# Altium PCB FPW1-0-2.PcbDoc (part 10 of 11)
Units mm, origin at the board's own origin, x right, y up, seen from the top; angles counter-clockwise.
Board outline 85 x 56 mm, 4 copper layers (Top Layer, GND_Plane, 3V3_Plane, Bottom Layer); 182 components, 321 nets, 1106 pads, 360 vias.
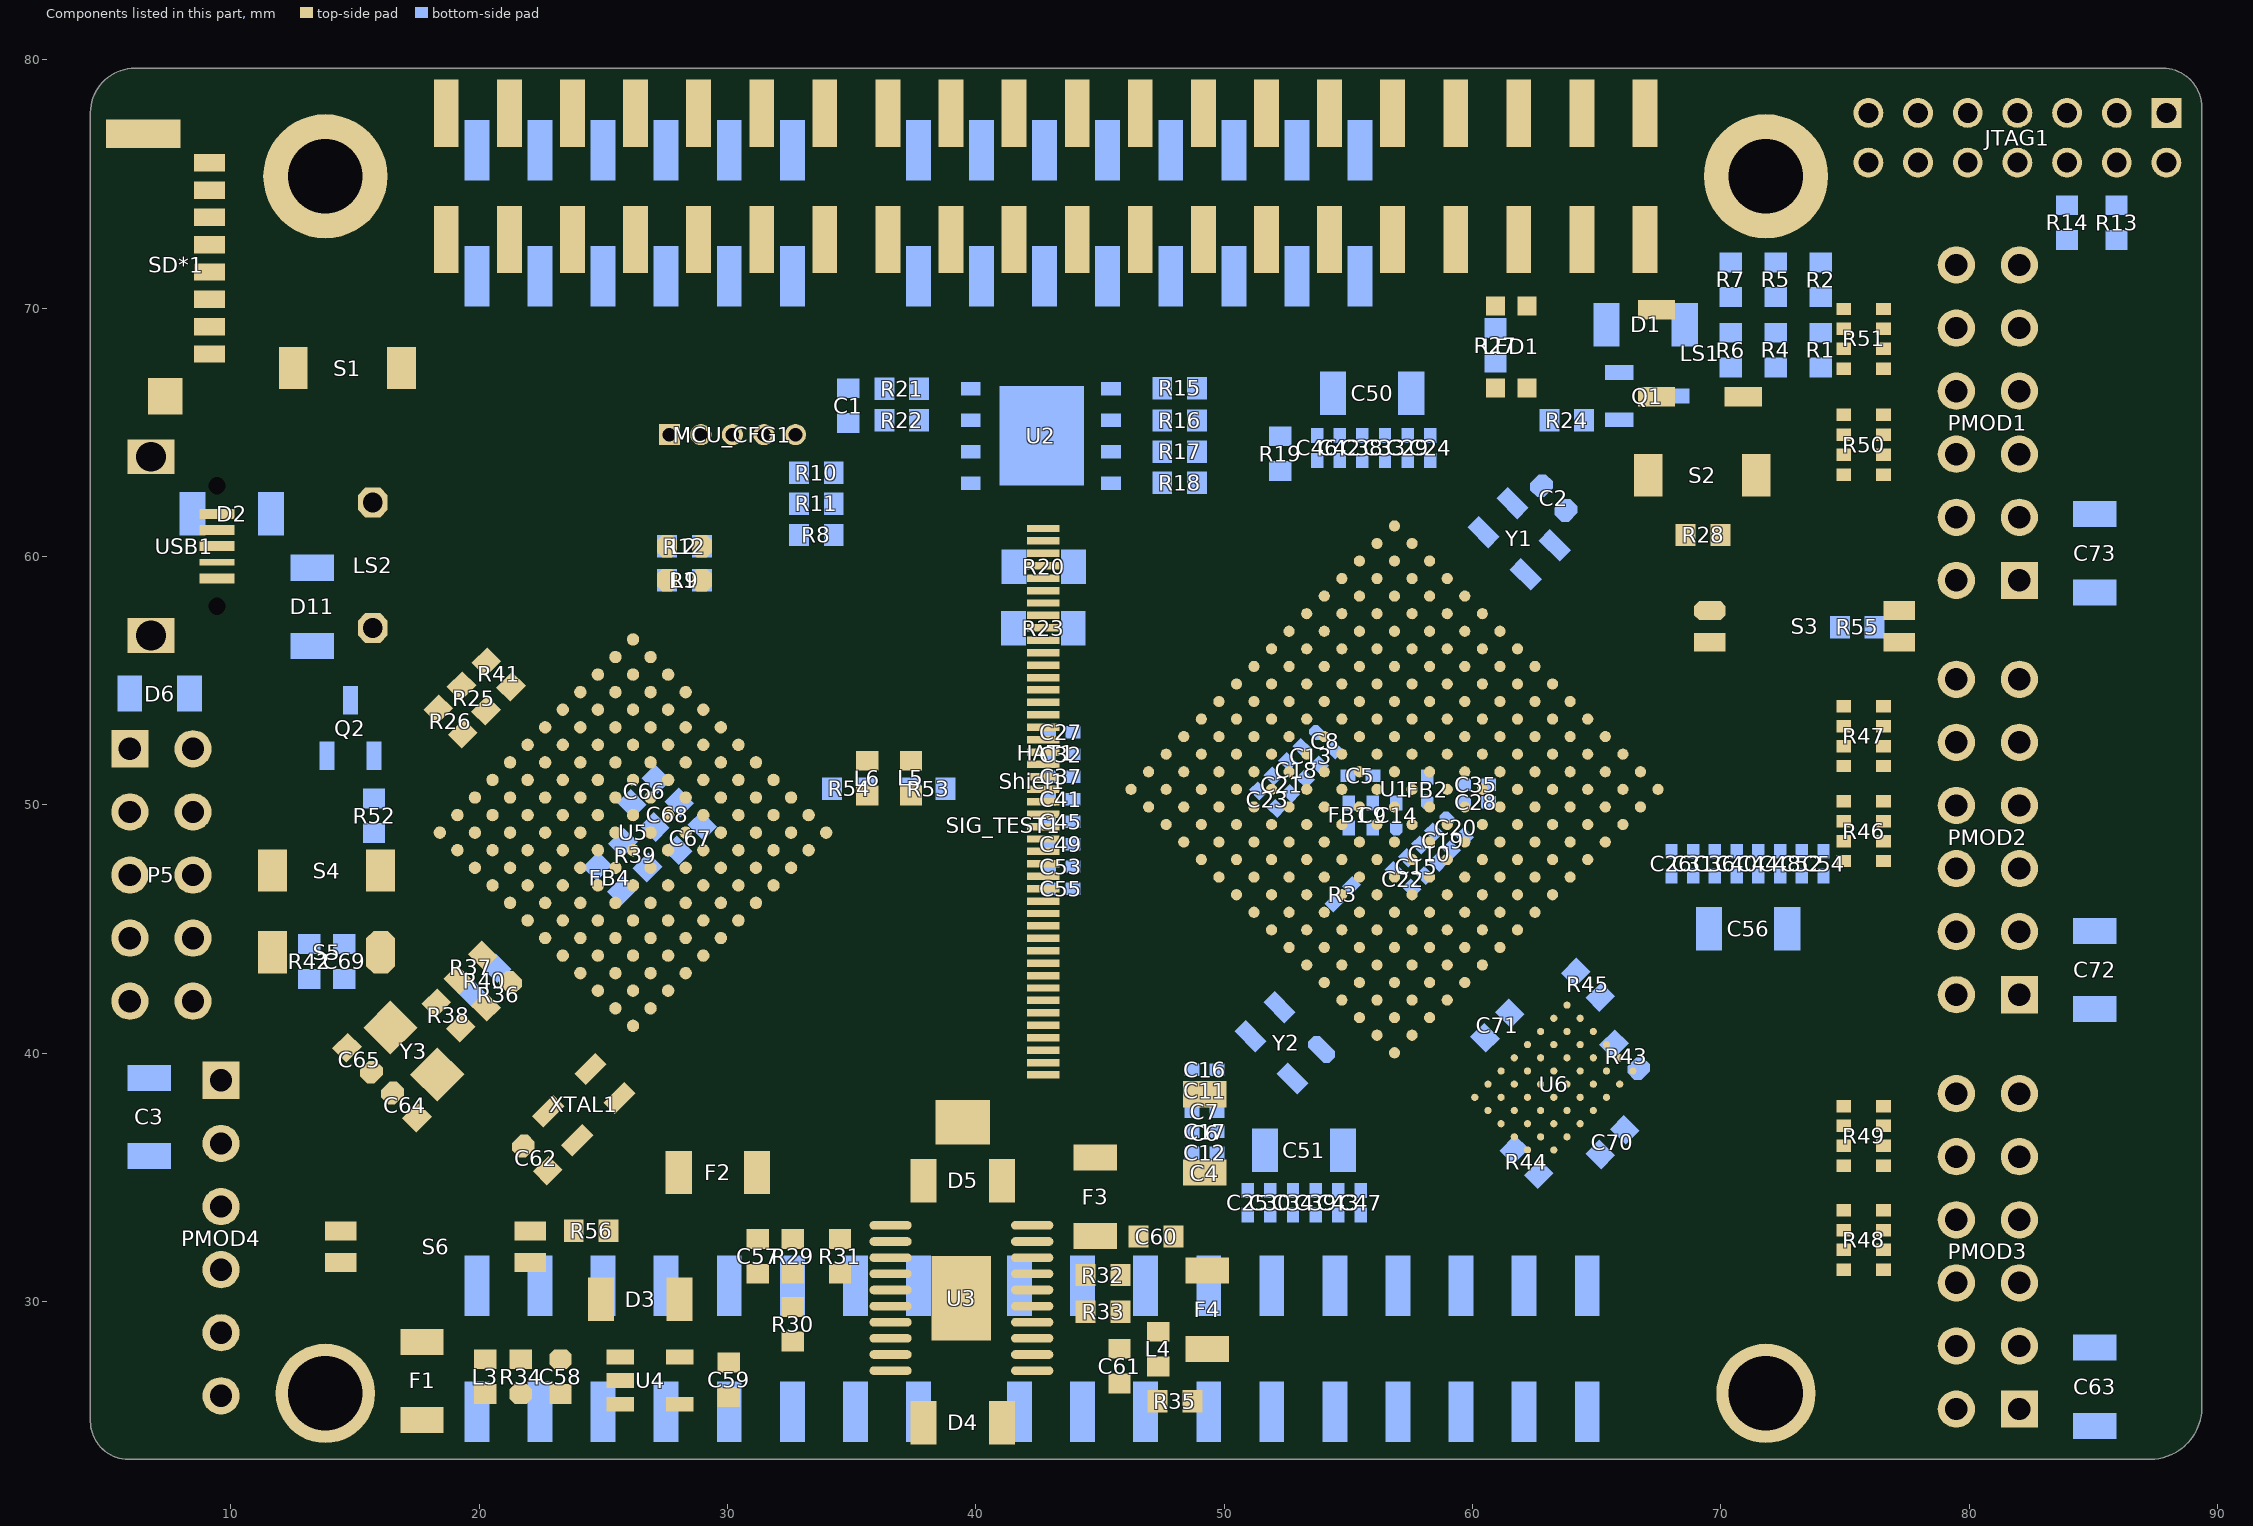
[diagram p12: the components of this part, seen from the top]

## Via types
v1: diameter 0.45, hole 0.2, Top Layer to Bottom Layer, tented both sides, 280 vias
v2: diameter 0.61, hole 0.33, Top Layer to Bottom Layer, tented both sides, 40 vias
v3: diameter 0.403, hole 0.2, Top Layer to Bottom Layer, tented both sides, 15 vias
v4: diameter 0.5, hole 0.2, Top Layer to Bottom Layer, tented both sides, 12 vias
v5: diameter 0.864, hole 0.508, Top Layer to Bottom Layer, tented both sides, 11 vias
v6: diameter 0.864, hole 0.356, Top Layer to Bottom Layer, tented both sides, 1 vias
v7: diameter 0.864, hole 0.381, Top Layer to Bottom Layer, tented both sides, 1 vias

## Nets (pads, with @x,y where several pads share a name; then routed paths per layer and width w, separated by ;. In a path a pad name is that pad's centre, name@x,y a point inside that pad or via, vN(x,y) a via of type N, cw(c..) or ccw(c..) an arc to the next point about the centre after c; other vN are vias at no path point) (continued)
copper on no net: (continued)
  Top Layer w0.025: 86.081,52.159 86.081,52.167 ; 86.081,67.78 86.081,67.814 ; 86.106,49.847 86.106,50.008 ; 86.106,52.184 86.106,52.218 ; 86.106,52.311 86.106,52.472 ; 86.106,67.729 86.106,67.89 ; 86.131,49.847 86.131,50.059 ; 86.131,52.184 86.131,52.523 ; 86.131,67.729 86.131,67.915 ; 86.157,49.924 86.157,50.085 ; 86.157,52.235 86.157,52.548 ; 86.157,67.831 86.157,67.941 ; 86.182,48.806 86.182,48.815 ; 86.182,49.949 86.182,50.11 ; 86.182,52.261 86.182,52.574 ; 86.182,64.198 86.182,64.207 ; 86.182,67.856 86.182,67.992 ; 86.208,48.831 86.208,48.84 ; 86.208,49.974 86.208,50.135 ; 86.208,52.286 86.208,52.548 ; 86.208,58.839 86.208,59 ; 86.208,64.224 86.208,64.258 ; 86.208,67.856 86.208,68.042 ; 86.233,48.831 86.233,48.865 ; 86.233,49.974 86.233,50.161 ; 86.233,52.311 86.233,52.523 ; 86.233,58.788 86.233,59.025 ; 86.233,64.224 86.233,64.283 ; 86.233,67.856 86.233,68.042 ; 86.258,46.571 86.258,46.579 ; 86.258,48.857 86.258,48.865 ; 86.258,49.974 86.258,50.186 ; 86.258,52.311 86.258,52.447 ; 86.258,58.737 86.258,59.076 ; 86.258,64.249 86.258,64.334 ; 86.258,67.323 86.258,67.458 ; 86.258,67.856 86.258,68.068 ; 86.284,46.419 86.284,46.681 ; 86.284,48.857 86.284,48.916 ; 86.284,49.974 86.284,50.186 ; 86.284,52.311 86.284,52.371 ; 86.284,58.737 86.284,59.102 ; 86.284,64.249 86.284,64.359 ; 86.284,67.373 86.284,67.534 ; 86.284,67.856 86.284,68.195 ; 86.309,46.342 86.309,46.706 ; 86.309,48.857 86.309,48.967 ; 86.309,49.314 86.309,49.424 ; 86.309,49.974 86.309,50.186 ; 86.309,52.286 86.309,52.345 ; 86.309,52.438 86.309,52.548 ; 86.309,58.306 86.309,58.416 ; 86.309,58.712 86.309,58.746 ; 86.309,58.941 86.309,59.127 ; 86.309,64.249 86.309,64.41 ; 86.309,67.399 86.309,67.534 ; 86.309,67.856 86.309,68.246 ; 86.335,46.215 86.335,46.732 ; 86.335,48.882 86.335,48.992 ; 86.335,49.365 86.335,49.526 ; 86.335,49.949 86.335,50.186 ; 86.335,52.261 86.335,52.625 ; 86.335,58.255 86.335,58.467 ; 86.335,58.687 86.335,58.721 ; 86.335,58.966 86.335,59.152 ; 86.335,64.224 86.335,64.41 ; 86.335,67.399 86.335,67.534 ; 86.335,67.754 86.335,68.246 ; 86.36,46.139 86.36,46.757 ; 86.36,48.882 86.36,49.018 ; 86.36,49.39 86.36,49.551 ; 86.36,49.949 86.36,50.161 ; 86.36,52.235 86.36,52.65 ; 86.36,58.331 86.36,58.492 ; 86.36,58.661 86.36,58.695 ; 86.36,58.991 86.36,59.178 ; 86.36,64.224 86.36,64.436 ; 86.36,64.63 86.36,64.664 ; 86.36,67.424 86.36,67.56 ; 86.36,67.653 86.36,68.246 ; 86.385,46.012 86.385,46.783 ; 86.385,48.882 86.385,49.043 ; 86.385,49.416 86.385,49.577 ; 86.385,49.949 86.385,50.135 ; 86.385,52.184 86.385,52.625 ; 86.385,58.382 86.385,58.543 ; 86.385,58.661 86.385,58.67 ; 86.385,58.991 86.385,59.178 ; 86.385,64.198 86.385,64.436 ; 86.385,64.656 86.385,64.74 ; 86.385,67.45 86.385,68.246 ; 86.411,45.885 86.411,46.808 ; 86.411,48.857 86.411,49.069 ; 86.411,49.416 86.411,49.577 ; 86.411,49.924 86.411,50.135 ; 86.411,52.032 86.411,52.625 ; 86.411,58.433 86.411,58.594 ; 86.411,58.636 86.411,58.67 ; 86.411,58.991 86.411,59.203 ; 86.411,64.173 86.411,64.436 ; 86.411,64.656 86.411,64.842 ; 86.411,67.424 86.411,68.22 ; 86.436,45.783 86.436,45.792 ; 86.436,45.86 86.436,46.402 ; 86.436,46.495 86.436,46.808 ; 86.436,48.857 86.436,49.069 ; 86.436,49.441 86.436,49.577 ; 86.436,49.924 86.436,50.11 ; 86.436,52.057 86.436,52.599 ; 86.436,58.458 86.436,58.644 ; 86.436,59.017 86.436,59.229 ; 86.436,64.148 86.436,64.436 ; 86.436,64.656 86.436,64.842 ; 86.436,67.348 86.436,68.169 ; 86.462,43.243 86.462,43.252 ; 86.462,45.961 86.462,46.3 ; 86.462,46.495 86.462,46.783 ; 86.462,48.857 86.462,49.069 ; 86.462,49.441 86.462,49.577 ; 86.462,49.924 86.462,50.11 ; 86.462,52.083 86.462,52.574 ; 86.462,58.509 86.462,58.67 ; 86.462,59.017 86.462,59.229 ; 86.462,61.531 86.462,61.54 ; 86.462,64.148 86.462,64.41 ; 86.462,64.656 86.462,64.867 ; 86.462,67.246 86.462,67.966 ; 86.487,43.243 86.487,43.303 ; 86.487,46.038 86.487,46.173 ; 86.487,46.495 86.487,46.757 ; 86.487,48.831 86.487,49.043 ; 86.487,49.441 86.487,49.577 ; 86.487,49.924 86.487,50.11 ; 86.487,50.152 86.487,50.237 ; 86.487,52.133 86.487,52.625 ; 86.487,58.509 86.487,58.721 ; 86.487,59.017 86.487,59.229 ; 86.487,61.531 86.487,61.591 ; 86.487,64.122 86.487,64.385 ; 86.487,64.656 86.487,64.867 ; 86.487,67.246 86.487,67.661 ; 86.487,67.78 86.487,67.941 ; 86.512,43.269 86.512,43.328 ; 86.512,46.088 86.512,46.097 ; 86.512,46.495 86.512,46.757 ; 86.512,48.831 86.512,48.992 ; 86.512,49.441 86.512,49.602 ; 86.512,49.898 86.512,50.288 ; 86.512,52.184 86.512,52.675 ; 86.512,58.534 86.512,58.746 ; 86.512,59.017 86.512,59.229 ; 86.512,61.557 86.512,61.616 ; 86.512,64.097 86.512,64.359 ; 86.512,64.63 86.512,64.867 ; 86.512,67.323 86.512,67.585 ; 86.512,67.78 86.512,67.915 ; 86.538,43.269 86.538,43.379 ; 86.538,46.495 86.538,46.732 ; 86.538,48.806 86.538,48.967 ; 86.538,49.466 86.538,49.602 ; 86.538,49.873 86.538,50.313 ; 86.538,52.21 86.538,52.32 ; 86.538,52.514 86.538,52.701 ; 86.538,58.534 86.538,58.746 ; 86.538,59.017 86.538,59.229 ; 86.538,61.557 86.538,61.667 ; 86.538,64.046 86.538,64.359 ; 86.538,64.63 86.538,64.842 ; 86.538,67.373 86.538,67.585 ; 86.538,67.78 86.538,67.915 ; 86.538,68.034 86.538,68.22 ; 86.563,43.294 86.563,43.404 ; 86.563,46.469 86.563,46.706 ; 86.563,48.781 86.563,48.916 ; 86.563,49.466 86.563,49.602 ; 86.563,49.771 86.563,50.313 ; 86.563,52.565 86.563,52.726 ; 86.563,58.56 86.563,58.771 ; 86.563,59.017 86.563,59.229 ; 86.563,61.582 86.563,61.692 ; 86.563,64.021 86.563,64.334 ; 86.563,64.605 86.563,64.817 ; 86.563,67.45 86.563,67.585 ; 86.563,67.754 86.563,68.246 ; 86.589,43.294 86.589,43.43 ; 86.589,46.469 86.589,46.681 ; 86.589,48.755 86.589,48.865 ; 86.589,49.466 86.589,49.602 ; 86.589,49.67 86.589,50.313 ; 86.589,52.565 86.589,52.777 ; 86.589,58.56 86.589,58.771 ; 86.589,59.017 86.589,59.229 ; 86.589,61.582 86.589,61.718 ; 86.589,63.995 86.589,64.283 ; 86.589,64.579 86.589,64.817 ; 86.589,67.475 86.589,67.585 ; 86.589,67.754 86.589,68.246 ; 86.614,43.269 86.614,43.481 ; 86.614,46.444 86.614,46.656 ; 86.614,48.73 86.614,48.815 ; 86.614,49.466 86.614,50.313 ; 86.614,51.981 86.614,52.04 ; 86.614,52.565 86.614,52.777 ; 86.614,58.56 86.614,58.771 ; 86.614,59.017 86.614,59.229 ; 86.614,61.557 86.614,61.769 ; 86.614,63.97 86.614,64.258 ; 86.614,64.554 86.614,64.791 ; 86.614,65.596 86.614,65.782 ; 86.614,67.475 86.614,67.585 ; 86.614,67.729 86.614,68.271 ; 86.614,70.193 86.614,70.201 ; 86.639,43.269 86.639,43.506 ; 86.639,46.444 86.639,46.63 ; 86.639,48.704 86.639,48.789 ; 86.639,49.466 86.639,50.059 ; 86.639,50.203 86.639,50.288 ; 86.639,52.006 86.639,52.167 ; 86.639,52.565 86.639,52.777 ; 86.639,58.56 86.639,58.771 ; 86.639,59.017 86.639,59.229 ; 86.639,61.557 86.639,61.794 ; 86.639,63.944 86.639,64.232 ; 86.639,64.554 86.639,64.766 ; 86.639,65.494 86.639,65.833 ; 86.639,67.501 86.639,67.585 ; 86.639,67.678 86.639,68.271 ; 86.639,70.117 86.639,70.201 ; 86.665,43.294 86.665,43.506 ; 86.665,46.419 86.665,46.605 ; 86.665,48.679 86.665,48.738 ; 86.665,49.187 86.665,49.272 ; 86.665,49.34 86.665,50.008 ; 86.665,52.032 86.665,52.193 ; 86.665,52.54 86.665,52.777 ; 86.665,58.56 86.665,58.771 ; 86.665,59.017 86.665,59.229 ; 86.665,61.582 86.665,61.794 ; 86.665,63.919 86.665,64.182 ; 86.665,64.529 86.665,64.74 ; 86.665,65.443 86.665,65.858 ; 86.665,67.501 86.665,68.271 ; 86.665,70.04 86.665,70.201 ; 86.69,43.294 86.69,43.531 ; 86.69,46.368 86.69,46.656 ; 86.69,48.654 86.69,48.688 ; 86.69,49.212 86.69,49.983 ; 86.69,52.083 86.69,52.218 ; 86.69,52.514 86.69,52.726 ; 86.69,58.56 86.69,58.771 ; 86.69,59.017 86.69,59.229 ; 86.69,61.582 86.69,61.819 ; 86.69,63.894 86.69,64.156 ; 86.69,64.503 86.69,64.74 ; 86.69,65.367 86.69,65.883 ; 86.69,67.501 86.69,67.966 ; 86.69,68.034 86.69,68.246 ; 86.69,69.99 86.69,70.201 ; 86.716,43.269 86.716,43.506 ; 86.716,46.291 86.716,46.656 ; 86.716,48.603 86.716,48.637 ; 86.716,49.289 86.716,49.704 ; 86.716,49.847 86.716,49.983 ; 86.716,52.108 86.716,52.244 ; 86.716,52.489 86.716,52.701 ; 86.716,58.56 86.716,58.771 ; 86.716,59.017 86.716,59.229 ; 86.716,61.557 86.716,61.794 ; 86.716,63.868 86.716,64.131 ; 86.716,64.478 86.716,64.715 ; 86.716,65.316 86.716,65.883 ; 86.716,67.475 86.716,67.89 ; 86.716,68.034 86.716,68.246 ; 86.716,69.99 86.716,70.201 ; 86.741,43.269 86.741,43.481 ; 86.741,46.164 86.741,46.656 ; 86.741,48.578 86.741,48.586 ; 86.741,49.314 86.741,49.627 ; 86.741,49.847 86.741,49.958 ; 86.741,52.108 86.741,52.269 ; 86.741,52.489 86.741,52.65 ; 86.741,58.585 86.741,58.771 ; 86.741,59.017 86.741,59.229 ; 86.741,61.557 86.741,61.769 ; 86.741,63.843 86.741,64.08 ; 86.741,64.453 86.741,64.664 ; 86.741,65.265 86.741,65.579 ; 86.741,65.697 86.741,65.909 ; 86.741,67.145 86.741,67.153 ; 86.741,67.424 86.741,67.788 ; 86.741,68.034 86.741,68.246 ; 86.741,69.99 86.741,70.201 ; 86.766,43.243 86.766,43.455 ; 86.766,46.063 86.766,46.605 ; 86.766,48.527 86.766,48.561 ; 86.766,49.34 86.766,49.602 ; 86.766,49.822 86.766,49.932 ; 86.766,52.108 86.766,52.269 ; 86.766,52.464 86.766,53.056 ; 86.766,58.585 86.766,58.771 ; 86.766,59.017 86.766,59.229 ; 86.766,61.531 86.766,61.743 ; 86.766,63.817 86.766,64.055 ; 86.766,64.427 86.766,64.639 ; 86.766,65.189 86.766,65.502 ; 86.766,65.748 86.766,65.934 ; 86.766,67.069 86.766,67.28 ; 86.766,67.373 86.766,67.738 ; 86.766,68.034 86.766,68.22 ; 86.766,69.99 86.766,70.201 ; 86.792,43.243 86.792,43.43 ; 86.792,46.038 86.792,46.529 ; 86.792,48.476 86.792,48.51 ; 86.792,49.441 86.792,49.602 ; 86.792,49.822 86.792,49.907 ; 86.792,52.133 86.792,52.269 ; 86.792,52.438 86.792,53.107 ; 86.792,58.585 86.792,58.771 ; 86.792,59.017 86.792,59.229 ; 86.792,61.531 86.792,61.718 ; 86.792,63.792 86.792,64.029 ; 86.792,64.402 86.792,64.613 ; 86.792,65.138 86.792,65.452 ; 86.792,65.748 86.792,65.934 ; 86.792,67.145 86.792,67.458 ; 86.792,67.501 86.792,67.738 ; 86.792,68.059 86.792,68.22 ; 86.792,69.99 86.792,70.176 ; 86.817,43.243 86.817,43.43 ; 86.817,46.164 86.817,46.427 ; 86.817,48.45 86.817,48.459 ; 86.817,49.466 86.817,49.602 ; 86.817,49.822 86.817,49.907 ; 86.817,52.133 86.817,53.133 ; 86.817,58.585 86.817,58.771 ; 86.817,59.017 86.817,59.229 ; 86.817,61.531 86.817,61.718 ; 86.817,63.767 86.817,64.004 ; 86.817,64.376 86.817,64.563 ; 86.817,65.087 86.817,65.426 ; 86.817,65.773 86.817,65.96 ; 86.817,67.17 86.817,67.357 ; 86.817,67.602 86.817,67.738 ; 86.817,68.034 86.817,68.22 ; 86.817,69.99 86.817,70.176 ; 86.843,43.243 86.843,43.404 ; 86.843,46.19 86.843,46.402 ; 86.843,48.425 86.843,48.434 ; 86.843,49.492 86.843,49.602 ; 86.843,49.797 86.843,49.881 ; 86.843,52.133 86.843,53.158 ; 86.843,58.585 86.843,58.771 ; 86.843,59.017 86.843,59.229 ; 86.843,61.531 86.843,61.692 ; 86.843,63.741 86.843,63.953 ; 86.843,64.376 86.843,64.537 ; 86.843,65.011 86.843,65.375 ; 86.843,65.773 86.843,65.96 ; 86.843,67.196 86.843,67.382 ; 86.843,67.602 86.843,67.738 ; 86.843,68.034 86.843,68.195 ; 86.843,69.964 86.843,70.176 ; 86.868,43.218 86.868,43.404 ; 86.868,45.529 86.868,45.589 ; 86.868,46.291 86.868,46.427 ; 86.868,48.425 86.868,48.434 ; 86.868,49.492 86.868,49.602 ; 86.868,49.797 86.868,49.881 ; 86.868,52.057 86.868,53.183 ; 86.868,58.585 86.868,58.771 ; 86.868,59.017 86.868,59.229 ; 86.868,61.506 86.868,61.692 ; 86.868,63.716 86.868,63.953 ; 86.868,64.325 86.868,64.512 ; 86.868,64.96 86.868,65.325 ; 86.868,65.773 86.868,65.96 ; 86.868,67.221 86.868,67.382 ; 86.868,67.627 86.868,67.738 ; 86.868,68.034 86.868,68.195 ; 86.868,69.964 86.868,70.176 ; 86.893,43.218 86.893,43.379 ; 86.893,45.555 86.893,45.716 ; 86.893,46.317 86.893,46.452 ; 86.893,48.4 86.893,48.434 ; 86.893,49.492 86.893,49.602 ; 86.893,49.771 86.893,49.856 ; 86.893,51.981 86.893,53.183 ; 86.893,58.585 86.893,58.771 ; 86.893,59.017 86.893,59.229 ; 86.893,59.271 86.893,59.432 ; 86.893,61.506 86.893,61.667 ; 86.893,63.665 86.893,64.029 ; 86.893,64.3 86.893,64.461 ; 86.893,64.834 86.893,65.299 ; 86.893,65.773 86.893,65.96 ; 86.893,67.221 86.893,67.382 ; 86.893,67.627 86.893,67.738 ; 86.893,68.034 86.893,68.195 ; 86.893,69.964 86.893,70.176 ; 86.919,43.193 86.919,43.379 ; 86.919,45.555 86.919,45.767 ; 86.919,46.342 86.919,46.478 ; 86.919,48.425 86.919,48.434 ; 86.919,49.517 86.919,49.602 ; 86.919,49.771 86.919,49.831 ; 86.919,50.076 86.919,50.237 ; 86.919,51.88 86.919,53.183 ; 86.919,58.585 86.919,58.771 ; 86.919,59.017 86.919,59.61 ; 86.919,61.481 86.919,61.667 ; 86.919,63.64 86.919,63.826 ; 86.919,63.919 86.919,64.105 ; 86.919,64.224 86.919,64.41 ; 86.919,64.859 86.919,65.248 ; 86.919,65.773 86.919,65.96 ; 86.919,67.246 86.919,67.407 ; 86.919,67.627 86.919,67.738 ; 86.919,68.008 86.919,68.169 ; 86.919,69.964 86.919,70.176 ; 86.944,43.193 86.944,43.379 ; 86.944,45.58 86.944,45.792 ; 86.944,46.342 86.944,46.503 ; 86.944,48.425 86.944,48.459 ; 86.944,49.543 86.944,49.602 ; 86.944,49.746 86.944,49.831 ; 86.944,49.949 86.944,50.288 ; 86.944,51.752 86.944,52.447 ; 86.944,53.048 86.944,53.158 ; 86.944,58.585 86.944,58.771 ; 86.944,59.017 86.944,59.66 ; 86.944,61.481 86.944,61.667 ; 86.944,63.614 86.944,63.775 ; 86.944,63.944 86.944,64.105 ; 86.944,64.198 86.944,64.359 ; 86.944,64.884 86.944,65.223 ; 86.944,65.773 86.944,65.96 ; 86.944,67.246 86.944,67.407 ; 86.944,67.627 86.944,67.763 ; 86.944,68.008 86.944,68.169 ; 86.944,69.964 86.944,70.176 ; 86.97,43.193 86.97,43.354 ; 86.97,45.58 86.97,45.792 ; 86.97,46.368 86.97,46.529 ; 86.97,48.45 86.97,48.484 ; 86.97,49.543 86.97,49.602 ; 86.97,49.721 86.97,50.313 ; 86.97,51.498 86.97,52.32 ; 86.97,53.149 86.97,53.158 ; 86.97,58.585 86.97,58.771 ; 86.97,58.915 86.97,59.686 ; 86.97,61.481 86.97,61.642 ; 86.97,63.563 86.97,63.75 ; 86.97,63.944 86.97,64.131 ; 86.97,64.198 86.97,64.436 ; 86.97,64.884 86.97,65.172 ; 86.97,65.773 86.97,65.96 ; 86.97,67.221 86.97,67.407 ; 86.97,67.653 86.97,67.814 ; 86.97,68.008 86.97,68.144 ; 86.97,69.964 86.97,70.151 ; 86.995,43.193 86.995,43.354 ; 86.995,45.58 86.995,45.792 ; 86.995,46.368 86.995,46.554 ; 86.995,48.45 86.995,48.535 ; 86.995,49.568 86.995,49.602 ; 86.995,49.695 86.995,50.339 ; 86.995,51.448 86.995,52.193 ; 86.995,57.798 86.995,57.832 ; 86.995,58.56 86.995,59.686 ; 86.995,61.481 86.995,61.642 ; 86.995,63.513 86.995,63.674 ; 86.995,63.97 86.995,64.131 ; 86.995,64.198 86.995,64.486 ; 86.995,64.884 86.995,64.893 ; 86.995,64.96 86.995,65.147 ; 86.995,65.748 86.995,65.934 ; 86.995,67.221 86.995,67.407 ; 86.995,67.653 86.995,67.839 ; 86.995,67.983 86.995,68.144 ; 86.995,69.964 86.995,70.151 ; 87.02,43.167 87.02,43.328 ; 87.02,45.606 87.02,45.792 ; 87.02,46.393 87.02,46.579 ; 87.02,46.926 87.02,46.96 ; 87.02,48.476 87.02,48.611 ; 87.02,49.568 87.02,50.339 ; 87.02,51.422 87.02,51.431 ; 87.02,51.651 87.02,52.091 ; 87.02,52.565 87.02,52.752 ; 87.02,57.823 87.02,57.933 ; 87.02,58.56 87.02,59.711 ; 87.02,61.455 87.02,61.616 ; 87.02,63.487 87.02,63.623 ; 87.02,63.97 87.02,64.156 ; 87.02,64.224 87.02,64.512 ; 87.02,64.859 87.02,64.893 ; 87.02,64.986 87.02,65.147 ; 87.02,65.748 87.02,65.934 ; 87.02,67.246 87.02,67.407 ; 87.02,67.653 87.02,67.839 ; 87.02,67.983 87.02,68.144 ; 87.02,69.964 87.02,70.151 ; 87.046,43.167 87.046,43.328 ; 87.046,45.606 87.046,45.792 ; 87.046,46.393 87.046,46.579 ; 87.046,46.774 87.046,47.113 ; 87.046,48.476 87.046,48.662 ; 87.046,49.492 87.046,50.313 ; 87.046,51.702 87.046,51.99 ; 87.046,52.464 87.046,52.777 ; 87.046,57.848 87.046,57.984 ; 87.046,58.509 87.046,59.686 ; 87.046,61.455 87.046,61.616 ; 87.046,63.436 87.046,63.572 ; 87.046,63.97 87.046,64.156 ; 87.046,64.325 87.046,64.512 ; 87.046,64.834 87.046,64.867 ; 87.046,65.011 87.046,65.147 ; 87.046,65.748 87.046,65.934 ; 87.046,67.246 87.046,67.407 ; 87.046,67.627 87.046,67.865 ; 87.046,67.958 87.046,68.119 ; 87.046,69.964 87.046,70.151 ; 87.071,43.167 87.071,43.328 ; 87.071,45.606 87.071,45.767 ; 87.071,46.419 87.071,46.605 ; 87.071,46.749 87.071,47.189 ; 87.071,48.501 87.071,48.713 ; 87.071,49.39 87.071,50.288 ; 87.071,51.727 87.071,51.913 ; 87.071,52.362 87.071,52.777 ; 87.071,57.874 87.071,58.035 ; 87.071,58.433 87.071,59.686 ; 87.071,61.455 87.071,61.616 ; 87.071,63.97 87.071,64.156 ; 87.071,64.351 87.071,64.512 ; 87.071,64.834 87.071,64.867 ; 87.071,65.011 87.071,65.147 ; 87.071,65.748 87.071,65.934 ; 87.071,67.246 87.071,67.407 ; 87.071,67.627 87.071,68.119 ; 87.071,69.964 87.071,70.151 ; 87.097,43.142 87.097,43.303 ; 87.097,45.606 87.097,45.767 ; 87.097,46.419 87.097,46.605 ; 87.097,46.672 87.097,47.24 ; 87.097,48.527 87.097,48.738 ; 87.097,49.212 87.097,50.034 ; 87.097,50.203 87.097,50.237 ; 87.097,52.261 87.097,52.777 ; 87.097,57.899 87.097,58.06 ; 87.097,58.331 87.097,59.66 ; 87.097,61.43 87.097,61.591 ; 87.097,63.97 87.097,64.156 ; 87.097,64.351 87.097,64.512 ; 87.097,64.808 87.097,64.867 ; 87.097,65.037 87.097,65.172 ; 87.097,65.748 87.097,65.909 ; 87.097,67.272 87.097,67.407 ; 87.097,67.602 87.097,68.119 ; 87.097,69.964 87.097,70.151 ; 87.122,43.142 87.122,43.303 ; 87.122,45.606 87.122,45.767 ; 87.122,46.419 87.122,47.265 ; 87.122,48.527 87.122,48.764 ; 87.122,49.085 87.122,49.932 ; 87.122,52.006 87.122,52.04 ; 87.122,52.184 87.122,52.777 ; 87.122,57.925 87.122,58.136 ; 87.122,58.204 87.122,59.635 ; 87.122,61.43 87.122,61.591 ; 87.122,63.97 87.122,64.156 ; 87.122,64.351 87.122,64.512 ; 87.122,64.783 87.122,64.842 ; 87.122,65.037 87.122,65.172 ; 87.122,65.748 87.122,65.909 ; 87.122,67.272 87.122,67.407 ; 87.122,67.551 87.122,68.093 ; 87.122,69.939 87.122,70.151 ; 87.147,43.116 87.147,43.328 ; 87.147,45.606 87.147,45.767 ; 87.147,46.419 87.147,47.24 ; 87.147,48.552 87.147,48.789 ; 87.147,49.009 87.147,49.043 ; 87.147,49.212 87.147,49.881 ; 87.147,51.981 87.147,52.777 ; 87.147,57.925 87.147,59.203 ; 87.147,61.404 87.147,61.616 ; 87.147,63.97 87.147,64.156 ; 87.147,64.351 87.147,64.512 ; 87.147,64.757 87.147,64.842 ; 87.147,65.037 87.147,65.172 ; 87.147,65.748 87.147,65.909 ; 87.147,67.297 87.147,67.763 ; 87.147,67.882 87.147,68.093 ; 87.147,69.939 87.147,70.151 ; 87.173,43.116 87.173,43.354 ; 87.173,45.606 87.173,45.767 ; 87.173,46.342 87.173,47.189 ; 87.173,48.552 87.173,48.789 ; 87.173,49.263 87.173,49.653 ; 87.173,49.822 87.173,49.932 ; 87.173,51.981 87.173,52.777 ; 87.173,57.925 87.173,58.873 ; 87.173,58.966 87.173,59.203 ; 87.173,61.404 87.173,61.642 ; 87.173,63.97 87.173,64.156 ; 87.173,64.351 87.173,64.512 ; 87.173,64.757 87.173,64.817 ; 87.173,65.037 87.173,65.172 ; 87.173,65.722 87.173,65.883 ; 87.173,67.297 87.173,67.407 ; 87.173,67.45 87.173,67.738 ; 87.173,67.882 87.173,68.093 ; 87.173,69.939 87.173,70.151 ; 87.198,43.091 87.198,43.379 ; 87.198,45.606 87.198,45.767 ; 87.198,46.241 87.198,46.91 ; 87.198,48.552 87.198,48.789 ; 87.198,49.289 87.198,49.526 ; 87.198,49.822 87.198,50.008 ; 87.198,51.956 87.198,52.167 ; 87.198,52.21 87.198,52.371 ; 87.198,52.54 87.198,52.777 ; 87.198,57.899 87.198,58.771 ; 87.198,58.991 87.198,59.203 ; 87.198,61.379 87.198,61.667 ; 87.198,63.995 87.198,64.156 ; 87.198,64.376 87.198,64.512 ; 87.198,64.732 87.198,64.817 ; 87.198,65.037 87.198,65.172 ; 87.198,65.722 87.198,65.883 ; 87.198,67.323 87.198,67.382 ; 87.198,67.45 87.198,67.738 ; 87.198,67.882 87.198,68.576 ; 87.198,69.939 87.198,70.125 ; 87.224,43.091 87.224,43.43 ; 87.224,45.606 87.224,45.767 ; 87.224,46.164 87.224,46.732 ; 87.224,48.552 87.224,48.764 ; 87.224,49.441 87.224,49.5 ; 87.224,49.873 87.224,50.034 ; 87.224,51.956 87.224,52.167 ; 87.224,52.261 87.224,52.371 ; 87.224,52.565 87.224,52.777 ; 87.224,57.798 87.224,58.467 ; 87.224,58.56 87.224,58.746 ; 87.224,58.991 87.224,59.178 ; 87.224,61.379 87.224,61.718 ; 87.224,63.995 87.224,64.156 ; 87.224,64.376 87.224,64.512 ; 87.224,64.706 87.224,64.817 ; 87.224,65.037 87.224,65.172 ; 87.224,65.722 87.224,65.883 ; 87.224,67.348 87.224,67.738 ; 87.224,67.805 87.224,68.677 ; 87.224,69.939 87.224,70.125 ; 87.249,43.066 87.249,43.252 ; 87.249,43.294 87.249,43.455 ; 87.249,45.606 87.249,45.767 ; 87.249,46.088 87.249,46.681 ; 87.249,48.552 87.249,48.764 ; 87.249,48.933 87.249,48.942 ; 87.249,49.441 87.249,49.551 ; 87.249,49.873 87.249,50.085 ; 87.249,51.956 87.249,52.167 ; 87.249,52.286 87.249,52.371 ; 87.249,52.565 87.249,52.777 ; 87.249,57.671 87.249,58.365 ; 87.249,58.56 87.249,58.746 ; 87.249,58.991 87.249,59.178 ; 87.249,61.354 87.249,61.54 ; 87.249,61.582 87.249,61.743 ; 87.249,63.995 87.249,64.156 ; 87.249,64.376 87.249,64.512 ; 87.249,64.706 87.249,64.791 ; 87.249,65.037 87.249,65.172 ; 87.249,65.722 87.249,65.883 ; 87.249,67.348 87.249,67.433 ; 87.249,67.475 87.249,68.728 ; 87.249,69.939 87.249,70.125 ; 87.274,43.066 87.274,43.227 ; 87.274,43.32 87.274,43.481 ; 87.274,45.606 87.274,45.741 ; 87.274,46.012 87.274,46.681 ; 87.274,48.552 87.274,48.738 ; 87.274,48.933 87.274,48.942 ; 87.274,49.466 87.274,49.602 ; 87.274,49.873 87.274,50.085 ; 87.274,51.981 87.274,52.167 ; 87.274,52.311 87.274,52.396 ; 87.274,52.565 87.274,52.777 ; 87.274,57.493 87.274,58.263 ; 87.274,58.56 87.274,58.771 ; 87.274,58.991 87.274,59.178 ; 87.274,61.354 87.274,61.515 ; 87.274,61.608 87.274,61.769 ; 87.274,63.995 87.274,64.156 ; 87.274,64.376 87.274,64.512 ; 87.274,64.681 87.274,64.791 ; 87.274,65.037 87.274,65.172 ; 87.274,65.697 87.274,65.858 ; 87.274,67.323 87.274,67.357 ; 87.274,67.475 87.274,68.754 ; 87.274,69.939 87.274,70.125 ; 87.3,43.04 87.3,43.227 ; 87.3,43.345 87.3,43.481 ; 87.3,45.606 87.3,45.741 ; 87.3,45.936 87.3,46.402 ; 87.3,46.495 87.3,46.681 ; 87.3,48.552 87.3,48.738 ; 87.3,48.933 87.3,48.942 ; 87.3,49.492 87.3,49.627 ; 87.3,49.873 87.3,50.085 ; 87.3,51.981 87.3,52.167 ; 87.3,52.311 87.3,52.421 ; 87.3,52.565 87.3,52.777 ; 87.3,57.594 87.3,58.213 ; 87.3,58.56 87.3,58.771 ; 87.3,58.991 87.3,59.178 ; 87.3,61.328 87.3,61.515 ; 87.3,61.633 87.3,61.769 ; 87.3,63.995 87.3,64.156 ; 87.3,64.376 87.3,64.512 ; 87.3,64.656 87.3,64.766 ; 87.3,65.037 87.3,65.172 ; 87.3,65.697 87.3,65.858 ; 87.3,67.272 87.3,67.306 ; 87.3,67.475 87.3,68.779 ; 87.3,69.939 87.3,70.125 ; 87.325,43.015 87.325,43.201 ; 87.325,43.345 87.325,43.506 ; 87.325,45.58 87.325,46.3 ; 87.325,46.52 87.325,46.681 ; 87.325,48.552 87.325,48.738 ; 87.325,48.908 87.325,48.942 ; 87.325,49.492 87.325,49.627 ; 87.325,49.873 87.325,50.085 ; 87.325,51.981 87.325,52.167 ; 87.325,52.311 87.325,52.421 ; 87.325,52.565 87.325,52.777 ; 87.325,57.671 87.325,58.162 ; 87.325,58.585 87.325,58.771 ; 87.325,58.991 87.325,59.178 ; 87.325,61.303 87.325,61.489 ; 87.325,61.633 87.325,61.794 ; 87.325,63.995 87.325,64.156 ; 87.325,64.376 87.325,64.512 ; 87.325,64.656 87.325,64.766 ; 87.325,65.037 87.325,65.172 ; 87.325,65.697 87.325,65.858 ; 87.325,67.221 87.325,67.23 ; 87.325,67.399 87.325,68.804 ; 87.325,69.939 87.325,70.125 ; 87.351,42.989 87.351,43.201 ; 87.351,43.37 87.351,43.531 ; 87.351,45.606 87.351,46.224 ; 87.351,46.52 87.351,46.706 ; 87.351,48.552 87.351,48.713 ; 87.351,48.908 87.351,48.942 ; 87.351,49.492 87.351,49.653 ; 87.351,49.873 87.351,50.085 ; 87.351,50.152 87.351,50.491 ; 87.351,51.981 87.351,52.167 ; 87.351,52.311 87.351,52.421 ; 87.351,52.565 87.351,52.777 ; 87.351,57.721 87.351,58.162 ; 87.351,58.56 87.351,58.746 ; 87.351,58.991 87.351,59.152 ; 87.351,61.277 87.351,61.489 ; 87.351,61.658 87.351,61.819 ; 87.351,63.995 87.351,64.156 ; 87.351,64.376 87.351,64.512 ; 87.351,64.63 87.351,64.766 ; 87.351,65.062 87.351,65.172 ; 87.351,65.672 87.351,65.858 ; 87.351,67.323 87.351,68.779 ; 87.351,69.939 87.351,70.125 ; 87.376,42.989 87.376,43.176 ; 87.376,43.37 87.376,43.557 ; 87.376,45.606 87.376,46.148 ; 87.376,46.545 87.376,46.706 ; 87.376,48.552 87.376,48.713 ; 87.376,48.908 87.376,48.942 ; 87.376,49.492 87.376,49.627 ; 87.376,49.873 87.376,50.542 ; 87.376,51.981 87.376,52.167 ; 87.376,52.311 87.376,52.421 ; 87.376,52.565 87.376,52.777 ; 87.376,57.772 87.376,58.162 ; 87.376,58.56 87.376,58.746 ; 87.376,58.991 87.376,59.152 ; 87.376,61.277 87.376,61.464 ; 87.376,61.658 87.376,61.845 ; 87.376,63.995 87.376,64.156 ; 87.376,64.376 87.376,64.512 ; 87.376,64.605 87.376,64.74 ; 87.376,65.062 87.376,65.172 ; 87.376,65.672 87.376,65.833 ; 87.376,67.221 87.376,68.068 ; 87.376,68.491 87.376,68.754 ; 87.376,69.939 87.376,70.125 ; 87.401,42.964 87.401,43.15 ; 87.401,43.396 87.401,43.582 ; 87.401,45.606 87.401,46.097 ; 87.401,46.545 87.401,46.732 ; 87.401,48.552 87.401,48.713 ; 87.401,48.882 87.401,48.942 ; 87.401,49.492 87.401,49.627 ; 87.401,49.873 87.401,50.567 ; 87.401,51.981 87.401,52.167 ; 87.401,52.311 87.401,52.421 ; 87.401,52.565 87.401,52.752 ; 87.401,57.975 87.401,58.162 ; 87.401,58.585 87.401,58.746 ; 87.401,58.991 87.401,59.152 ; 87.401,61.252 87.401,61.438 ; 87.401,61.684 87.401,61.87 ; 87.401,63.995 87.401,64.131 ; 87.401,64.351 87.401,64.512 ; 87.401,64.605 87.401,64.74 ; 87.401,65.062 87.401,65.172 ; 87.401,65.646 87.401,65.833 ; 87.401,67.145 87.401,68.042 ; 87.401,68.593 87.401,68.703 ; 87.401,69.939 87.401,70.125 ; 87.427,42.964 87.427,43.15 ; 87.427,43.396 87.427,43.608 ; 87.427,45.606 87.427,46.021 ; 87.427,46.571 87.427,46.732 ; 87.427,48.552 87.427,48.713 ; 87.427,48.882 87.427,48.942 ; 87.427,49.492 87.427,49.627 ; 87.427,49.746 87.427,50.593 ; 87.427,51.981 87.427,52.167 ; 87.427,52.311 87.427,52.421 ; 87.427,52.565 87.427,52.752 ; 87.427,57.975 87.427,58.162 ; 87.427,58.61 87.427,58.746 ; 87.427,58.991 87.427,59.152 ; 87.427,61.252 87.427,61.438 ; 87.427,61.684 87.427,61.896 ; 87.427,63.995 87.427,64.131 ; 87.427,64.351 87.427,64.512 ; 87.427,64.579 87.427,64.74 ; 87.427,65.062 87.427,65.198 ; 87.427,65.392 87.427,65.452 ; 87.427,65.621 87.427,65.833 ; 87.427,66.713 87.427,66.823 ; 87.427,67.043 87.427,67.763 ; 87.427,67.932 87.427,68.093 ; 87.427,69.939 87.427,70.125 ; 87.452,42.939 87.452,43.125 ; 87.452,43.421 87.452,43.633 ; 87.452,45.606 87.452,45.97 ; 87.452,46.571 87.452,46.732 ; 87.452,48.552 87.452,48.688 ; 87.452,48.882 87.452,48.942 ; 87.452,49.492 87.452,50.618 ; 87.452,51.981 87.452,52.167 ; 87.452,52.311 87.452,52.421 ; 87.452,52.565 87.452,52.752 ; 87.452,57.975 87.452,58.162 ; 87.452,58.61 87.452,58.746 ; 87.452,58.991 87.452,59.152 ; 87.452,61.227 87.452,61.413 ; 87.452,61.709 87.452,61.921 ; 87.452,63.995 87.452,64.131 ; 87.452,64.351 87.452,64.512 ; 87.452,64.554 87.452,64.715 ; 87.452,65.062 87.452,65.198 ; 87.452,65.418 87.452,65.807 ; 87.452,66.713 87.452,66.849 ; 87.452,66.967 87.452,67.636 ; 87.452,67.958 87.452,68.144 ; 87.452,69.939 87.452,70.125 ; 87.478,42.939 87.478,43.125 ; 87.478,43.447 87.478,43.658 ; 87.478,45.606 87.478,45.741 ; 87.478,45.783 87.478,45.919 ; 87.478,46.596 87.478,46.757 ; 87.478,48.527 87.478,48.688 ; 87.478,48.857 87.478,48.992 ; 87.478,49.492 87.478,50.618 ; 87.478,51.981 87.478,52.167 ; 87.478,52.311 87.478,52.421 ; 87.478,52.54 87.478,52.752 ; 87.478,57.975 87.478,58.162 ; 87.478,58.636 87.478,58.746 ; 87.478,58.991 87.478,59.152 ; 87.478,61.227 87.478,61.413 ; 87.478,61.735 87.478,61.946 ; 87.478,63.995 87.478,64.131 ; 87.478,64.351 87.478,64.512 ; 87.478,64.554 87.478,64.715 ; 87.478,65.062 87.478,65.198 ; 87.478,65.418 87.478,65.807 ; 87.478,66.688 87.478,66.798 ; 87.478,66.891 87.478,67.585 ; 87.478,67.983 87.478,68.169 ; 87.478,69.939 87.478,70.125 ; 87.503,42.939 87.503,43.1 ; 87.503,43.447 87.503,43.684 ; 87.503,45.606 87.503,45.716 ; 87.503,45.809 87.503,45.868 ; 87.503,46.596 87.503,46.757 ; 87.503,48.527 87.503,48.688 ; 87.503,48.857 87.503,48.916 ; 87.503,48.984 87.503,49.094 ; 87.503,49.416 87.503,50.237 ; 87.503,50.406 87.503,50.643 ; 87.503,51.981 87.503,52.167 ; 87.503,52.311 87.503,52.498 ; 87.503,52.54 87.503,52.752 ; 87.503,58.001 87.503,58.162 ; 87.503,58.636 87.503,58.746 ; 87.503,58.991 87.503,59.127 ; 87.503,61.227 87.503,61.388 ; 87.503,61.735 87.503,61.972 ; 87.503,63.995 87.503,64.131 ; 87.503,64.351 87.503,64.715 ; 87.503,65.062 87.503,65.198 ; 87.503,65.443 87.503,65.782 ; 87.503,66.713 87.503,67.585 ; 87.503,68.008 87.503,68.271 ; 87.503,69.939 87.503,70.125 ; 87.528,42.913 87.528,43.074 ; 87.528,43.472 87.528,43.709 ; 87.528,45.606 87.528,45.716 ; 87.528,46.622 87.528,46.757 ; 87.528,48.527 87.528,48.688 ; 87.528,48.857 87.528,48.916 ; 87.528,49.009 87.528,49.17 ; 87.528,49.34 87.528,50.059 ; 87.528,50.432 87.528,50.669 ; 87.528,51.981 87.528,52.167 ; 87.528,52.311 87.528,52.752 ; 87.528,58.001 87.528,58.162 ; 87.528,58.661 87.528,58.746 ; 87.528,58.991 87.528,59.127 ; 87.528,61.201 87.528,61.362 ; 87.528,61.76 87.528,61.997 ; 87.528,63.995 87.528,64.131 ; 87.528,64.351 87.528,64.715 ; 87.528,65.062 87.528,65.198 ; 87.528,65.468 87.528,65.782 ; 87.528,66.713 87.528,67.56 ; 87.528,68.034 87.528,68.322 ; 87.528,69.939 87.528,70.1 ; 87.554,42.888 87.554,43.074 ; 87.554,43.472 87.554,43.709 ; 87.554,45.606 87.554,45.716 ; 87.554,46.622 87.554,46.783 ; 87.554,48.527 87.554,48.662 ; 87.554,48.831 87.554,48.916 ; 87.554,49.009 87.554,49.196 ; 87.554,49.314 87.554,50.034 ; 87.554,50.432 87.554,50.643 ; 87.554,51.981 87.554,52.167 ; 87.554,52.311 87.554,52.726 ; 87.554,53.073 87.554,53.361 ; 87.554,58.001 87.554,58.162 ; 87.554,58.687 87.554,58.746 ; 87.554,58.839 87.554,59.127 ; 87.554,61.176 87.554,61.362 ; 87.554,61.76 87.554,61.997 ; 87.554,63.995 87.554,64.131 ; 87.554,64.351 87.554,64.69 ; 87.554,65.062 87.554,65.198 ; 87.554,65.494 87.554,65.756 ; 87.554,66.713 87.554,67.306 ; 87.554,67.373 87.554,67.534 ; 87.554,68.085 87.554,68.373 ; 87.554,69.939 87.554,70.1 ; 87.579,42.862 87.579,43.049 ; 87.579,43.497 87.579,43.735 ; 87.579,45.606 87.579,45.716 ; 87.579,46.647 87.579,46.783 ; 87.579,48.527 87.579,48.662 ; 87.579,48.831 87.579,48.891 ; 87.579,49.009 87.579,49.221 ; 87.579,49.365 87.579,49.754 ; 87.579,49.873 87.579,50.008 ; 87.579,50.432 87.579,50.643 ; 87.579,51.981 87.579,52.167 ; 87.579,52.311 87.579,52.726 ; 87.579,53.048 87.579,53.437 ; 87.579,58.001 87.579,58.162 ; 87.579,58.737 87.579,59.127 ; 87.579,61.151 87.579,61.337 ; 87.579,61.785 87.579,62.023 ; 87.579,63.995 87.579,64.131 ; 87.579,64.351 87.579,64.69 ; 87.579,65.062 87.579,65.198 ; 87.579,65.519 87.579,65.756 ; 87.579,66.713 87.579,67.23 ; 87.579,67.348 87.579,67.509 ; 87.579,68.11 87.579,68.398 ; 87.579,69.939 87.579,70.1 ; 87.605,42.862 87.605,43.023 ; 87.605,43.523 87.605,43.785 ; 87.605,45.606 87.605,45.716 ; 87.605,46.647 87.605,46.808 ; 87.605,48.527 87.605,48.662 ; 87.605,48.831 87.605,48.891 ; 87.605,49.035 87.605,49.221 ; 87.605,49.416 87.605,49.602 ; 87.605,49.847 87.605,50.008 ; 87.605,50.432 87.605,50.643 ; 87.605,52.006 87.605,52.167 ; 87.605,52.337 87.605,52.726 ; 87.605,53.023 87.605,53.488 ; 87.605,58.001 87.605,58.162 ; 87.605,58.712 87.605,59.127 ; 87.605,61.151 87.605,61.311 ; 87.605,61.811 87.605,62.073 ; 87.605,63.995 87.605,64.131 ; 87.605,64.351 87.605,64.664 ; 87.605,65.062 87.605,65.198 ; 87.605,65.57 87.605,65.731 ; 87.605,66.713 87.605,67.179 ; 87.605,67.348 87.605,67.509 ; 87.605,68.135 87.605,68.449 ; 87.605,69.939 87.605,70.1 ; 87.63,42.837 87.63,43.023 ; 87.63,43.548 87.63,43.811 ; 87.63,45.606 87.63,45.716 ; 87.63,46.672 87.63,46.808 ; 87.63,48.527 87.63,48.662 ; 87.63,48.806 87.63,48.891 ; 87.63,49.035 87.63,49.221 ; 87.63,49.466 87.63,49.577 ; 87.63,49.847 87.63,49.983 ; 87.63,50.432 87.63,50.643 ; 87.63,52.006 87.63,52.167 ; 87.63,52.311 87.63,52.726 ; 87.63,52.997 87.63,53.514 ; 87.63,58.001 87.63,58.136 ; 87.63,58.661 87.63,59.102 ; 87.63,61.125 87.63,61.311 ; 87.63,61.836 87.63,62.099 ; 87.63,63.995 87.63,64.131 ; 87.63,64.325 87.63,64.664 ; 87.63,65.062 87.63,65.198 ; 87.63,65.596 87.63,65.706 ; 87.63,66.713 87.63,67.103 ; 87.63,67.323 87.63,67.458 ; 87.63,67.501 87.63,67.661 ; 87.63,68.161 87.63,68.5 ; 87.63,69.939 87.63,70.1 ; 87.655,42.812 87.655,42.998 ; 87.655,43.574 87.655,43.836 ; 87.655,45.606 87.655,45.716 ; 87.655,46.672 87.655,46.833 ; 87.655,48.527 87.655,48.662 ; 87.655,48.806 87.655,48.891 ; 87.655,49.035 87.655,49.221 ; 87.655,49.466 87.655,49.577 ; 87.655,49.847 87.655,49.983 ; 87.655,50.432 87.655,50.618 ; 87.655,52.006 87.655,52.167 ; 87.655,52.286 87.655,52.726 ; 87.655,52.972 87.655,53.006 ; 87.655,53.149 87.655,53.539 ; 87.655,58.001 87.655,58.136 ; 87.655,58.61 87.655,59.102 ; 87.655,61.1 87.655,61.286 ; 87.655,61.862 87.655,62.124 ; 87.655,63.995 87.655,64.131 ; 87.655,64.325 87.655,64.664 ; 87.655,65.062 87.655,65.198 ; 87.655,65.621 87.655,65.68 ; 87.655,66.739 87.655,67.052 ; 87.655,67.297 87.655,67.433 ; 87.655,67.551 87.655,67.738 ; 87.655,68.212 87.655,68.55 ; 87.655,69.939 87.655,70.1 ; 87.681,42.786 87.681,42.973 ; 87.681,43.599 87.681,43.862 ; 87.681,45.606 87.681,45.716 ; 87.681,46.698 87.681,46.833 ; 87.681,48.527 87.681,48.662 ; 87.681,48.806 87.681,48.865 ; 87.681,49.035 87.681,49.221 ; 87.681,49.441 87.681,49.577 ; 87.681,49.847 87.681,49.983 ; 87.681,50.432 87.681,50.618 ; 87.681,52.006 87.681,52.167 ; 87.681,52.261 87.681,52.396 ; 87.681,52.565 87.681,52.701 ; 87.681,52.946 87.681,52.98 ; 87.681,53.2 87.681,53.564 ; 87.681,58.001 87.681,58.136 ; 87.681,58.585 87.681,59.102 ; 87.681,61.074 87.681,61.261 ; 87.681,61.887 87.681,62.15 ; 87.681,63.995 87.681,64.131 ; 87.681,64.325 87.681,64.639 ; 87.681,65.062 87.681,65.198 ; 87.681,66.764 87.681,66.976 ; 87.681,67.297 87.681,67.433 ; 87.681,67.551 87.681,67.763 ; 87.681,68.237 87.681,68.627 ; 87.681,69.939 87.681,70.1 ; 87.706,42.761 87.706,42.947 ; 87.706,43.624 87.706,43.887 ; 87.706,45.606 87.706,45.716 ; 87.706,46.698 87.706,46.859 ; 87.706,48.527 87.706,48.637 ; 87.706,48.781 87.706,48.865 ; 87.706,49.035 87.706,49.196 ; 87.706,49.441 87.706,49.551 ; 87.706,49.847 87.706,49.958 ; 87.706,50.432 87.706,50.618 ; 87.706,52.032 87.706,52.167 ; 87.706,52.21 87.706,52.345 ; 87.706,52.565 87.706,52.65 ; 87.706,52.921 87.706,52.955 ; 87.706,53.251 87.706,53.59 ; 87.706,58.001 87.706,58.136 ; 87.706,58.661 87.706,59.102 ; 87.706,61.049 87.706,61.235 ; 87.706,61.912 87.706,62.175 ; 87.706,63.995 87.706,64.131 ; 87.706,64.325 87.706,64.639 ; 87.706,65.062 87.706,65.198 ; 87.706,66.815 87.706,66.899 ; 87.706,67.272 87.706,67.407 ; 87.706,67.577 87.706,67.763 ; 87.706,68.263 87.706,68.703 ; 87.706,69.939 87.706,70.1 ; 87.732,42.735 87.732,42.922 ; 87.732,43.624 87.732,43.938 ; 87.732,45.606 87.732,45.716 ; 87.732,46.063 87.732,46.071 ; 87.732,46.723 87.732,46.884 ; 87.732,48.527 87.732,48.637 ; 87.732,48.781 87.732,48.865 ; 87.732,49.035 87.732,49.196 ; 87.732,49.416 87.732,49.602 ; 87.732,49.822 87.732,49.958 ; 87.732,50.432 87.732,50.618 ; 87.732,52.032 87.732,52.294 ; 87.732,52.54 87.732,52.701 ; 87.732,52.921 87.732,52.955 ; 87.732,53.276 87.732,53.615 ; 87.732,58.001 87.732,58.136 ; 87.732,58.737 87.732,59.076 ; 87.732,61.023 87.732,61.21 ; 87.732,61.912 87.732,62.226 ; 87.732,63.995 87.732,64.131 ; 87.732,64.351 87.732,64.613 ; 87.732,65.062 87.732,65.198 ; 87.732,67.272 87.732,67.382 ; 87.732,67.577 87.732,67.763 ; 87.732,68.313 87.732,68.804 ; 87.732,69.939 87.732,70.1 ; 87.757,42.71 87.757,42.896 ; 87.757,43.65 87.757,43.963 ; 87.757,45.606 87.757,45.69 ; 87.757,46.038 87.757,46.071 ; 87.757,46.749 87.757,46.91 ; 87.757,47.409 87.757,47.418 ; 87.757,48.527 87.757,48.637 ; 87.757,48.755 87.757,48.865 ; 87.757,49.035 87.757,49.196 ; 87.757,49.416 87.757,49.704 ; 87.757,49.822 87.757,49.958 ; 87.757,50.432 87.757,50.593 ; 87.757,52.057 87.757,52.218 ; 87.757,52.565 87.757,52.777 ; 87.757,52.895 87.757,52.955 ; 87.757,53.327 87.757,53.615 ; 87.757,58.001 87.757,58.136 ; 87.757,58.839 87.757,59.076 ; 87.757,60.998 87.757,61.184 ; 87.757,61.938 87.757,62.251 ; 87.757,63.995 87.757,64.131 ; 87.757,64.376 87.757,64.613 ; 87.757,65.062 87.757,65.198 ; 87.757,67.246 87.757,67.357 ; 87.757,67.602 87.757,67.763 ; 87.757,68.339 87.757,68.881 ; 87.757,69.939 87.757,70.1 ; 87.782,42.685 87.782,42.871 ; 87.782,43.675 87.782,44.014 ; 87.782,45.606 87.782,45.69 ; 87.782,46.038 87.782,46.071 ; 87.782,46.749 87.782,46.91 ; 87.782,47.409 87.782,47.418 ; 87.782,48.527 87.782,48.637 ; 87.782,48.755 87.782,48.84 ; 87.782,49.035 87.782,49.196 ; 87.782,49.416 87.782,49.729 ; 87.782,49.822 87.782,50.059 ; 87.782,50.432 87.782,50.593 ; 87.782,52.057 87.782,52.167 ; 87.782,52.616 87.782,52.828 ; 87.782,52.87 87.782,52.955 ; 87.782,53.378 87.782,53.641 ; 87.782,58.001 87.782,58.136 ; 87.782,58.864 87.782,59.076 ; 87.782,60.973 87.782,61.159 ; 87.782,61.963 87.782,62.302 ; 87.782,63.995 87.782,64.131 ; 87.782,64.376 87.782,64.588 ; 87.782,65.087 87.782,65.198 ; 87.782,67.196 87.782,67.357 ; 87.782,67.602 87.782,67.788 ; 87.782,68.364 87.782,68.931 ; 87.782,69.939 87.782,70.074 ; 87.808,42.659 87.808,42.846 ; 87.808,43.701 87.808,44.039 ; 87.808,45.606 87.808,45.69 ; 87.808,46.012 87.808,46.071 ; 87.808,46.774 87.808,46.935 ; 87.808,47.409 87.808,47.418 ; 87.808,48.501 87.808,48.637 ; 87.808,48.755 87.808,48.84 ; 87.808,49.035 87.808,49.196 ; 87.808,49.39 87.808,49.932 ; 87.808,49.974 87.808,50.135 ; 87.808,50.432 87.808,50.593 ; 87.808,52.133 87.808,52.167 ; 87.808,52.642 87.808,52.955 ; 87.808,53.404 87.808,53.641 ; 87.808,58.001 87.808,58.136 ; 87.808,58.89 87.808,59.051 ; 87.808,60.947 87.808,61.134 ; 87.808,61.989 87.808,62.327 ; 87.808,63.995 87.808,64.131 ; 87.808,64.402 87.808,64.563 ; 87.808,65.087 87.808,65.198 ; 87.808,67.17 87.808,67.331 ; 87.808,67.602 87.808,67.788 ; 87.808,68.415 87.808,68.957 ; 87.808,69.939 87.808,70.049 ; 87.833,42.634 87.833,42.82 ; 87.833,43.726 87.833,44.065 ; 87.833,45.606 87.833,45.69 ; 87.833,45.987 87.833,46.071 ; 87.833,46.774 87.833,46.96 ; 87.833,48.501 87.833,48.637 ; 87.833,48.755 87.833,48.84 ; 87.833,49.035 87.833,49.196 ; 87.833,49.365 87.833,49.475 ; 87.833,49.568 87.833,49.907 ; 87.833,50 87.833,50.237 ; 87.833,50.432 87.833,50.593 ; 87.833,52.133 87.833,52.193 ; 87.833,52.667 87.833,52.955 ; 87.833,53.454 87.833,53.641 ; 87.833,58.026 87.833,58.136 ; 87.833,58.915 87.833,59.051 ; 87.833,60.922 87.833,61.108 ; 87.833,62.014 87.833,62.353 ; 87.833,63.995 87.833,64.131 ; 87.833,64.427 87.833,64.537 ; 87.833,65.087 87.833,65.198 ; 87.833,67.145 87.833,67.306 ; 87.833,67.602 87.833,67.788 ; 87.833,68.466 87.833,68.982 ; 87.833,69.939 87.833,69.998 ; 87.859,42.608 87.859,42.82 ; 87.859,43.752 87.859,44.09 ; 87.859,45.606 87.859,45.69 ; 87.859,45.961 87.859,46.071 ; 87.859,46.799 87.859,46.96 ; 87.859,47.434 87.859,47.443 ; 87.859,48.501 87.859,48.637 ; 87.859,48.73 87.859,48.84 ; 87.859,49.035 87.859,49.196 ; 87.859,49.365 87.859,49.475 ; 87.859,49.593 87.859,49.907 ; 87.859,50.025 87.859,50.262 ; 87.859,50.432 87.859,50.593 ; 87.859,52.159 87.859,52.193 ; 87.859,52.692 87.859,52.955 ; 87.859,53.48 87.859,53.641 ; 87.859,58.026 87.859,58.136 ; 87.859,58.915 87.859,59.025 ; 87.859,60.896 87.859,61.108 ; 87.859,62.039 87.859,62.378 ; 87.859,63.97 87.859,64.131 ; 87.859,64.427 87.859,64.512 ; 87.859,65.087 87.859,65.198 ; 87.859,67.12 87.859,67.28 ; 87.859,67.602 87.859,67.788 ; 87.859,68.516 87.859,69.033 ; 87.859,69.939 87.859,69.947 ; 87.884,42.583 87.884,42.795 ; 87.884,43.777 87.884,44.116 ; 87.884,45.606 87.884,45.69 ; 87.884,45.936 87.884,46.046 ; 87.884,46.825 87.884,46.986 ; 87.884,47.434 87.884,47.443 ; 87.884,48.501 87.884,48.637 ; 87.884,48.73 87.884,48.84 ; 87.884,49.035 87.884,49.196 ; 87.884,49.34 87.884,49.45 ; 87.884,49.593 87.884,49.881 ; 87.884,50.051 87.884,50.313 ; 87.884,50.432 87.884,50.567 ; 87.884,52.159 87.884,52.193 ; 87.884,52.718 87.884,52.955 ; 87.884,53.505 87.884,53.641 ; 87.884,58.026 87.884,58.136 ; 87.884,58.941 87.884,59.025 ; 87.884,60.871 87.884,61.083 ; 87.884,62.065 87.884,62.404 ; 87.884,63.97 87.884,64.131 ; 87.884,64.453 87.884,64.512 ; 87.884,65.087 87.884,65.198 ; 87.884,67.094 87.884,67.28 ; 87.884,67.602 87.884,67.788 ; 87.884,68.364 87.884,68.373 ; 87.884,68.567 87.884,69.084 ; 87.909,42.558 87.909,42.744 ; 87.909,43.802 87.909,44.166 ; 87.909,45.606 87.909,45.69 ; 87.909,45.91 87.909,46.046 ; 87.909,46.825 87.909,46.986 ; 87.909,47.434 87.909,47.519 ; 87.909,48.501 87.909,48.637 ; 87.909,48.73 87.909,48.84 ; 87.909,49.035 87.909,49.196 ; 87.909,49.314 87.909,49.424 ; 87.909,49.644 87.909,49.881 ; 87.909,50.076 87.909,50.339 ; 87.909,50.432 87.909,50.567 ; 87.909,52.159 87.909,52.218 ; 87.909,52.718 87.909,52.98 ; 87.909,53.556 87.909,53.615 ; 87.909,54.775 87.909,54.784 ; 87.909,58.026 87.909,58.136 ; 87.909,60.846 87.909,61.032 ; 87.909,62.09 87.909,62.454 ; 87.909,63.97 87.909,64.105 ; 87.909,65.087 87.909,65.198 ; 87.909,67.094 87.909,67.255 ; 87.909,67.602 87.909,67.788 ; 87.909,68.237 87.909,68.474 ; 87.909,68.618 87.909,69.084 ; 87.935,42.558 87.935,42.719 ; 87.935,43.828 87.935,44.192 ; 87.935,45.58 87.935,45.69 ; 87.935,45.885 87.935,46.021 ; 87.935,46.85 87.935,47.011 ; 87.935,47.434 87.935,47.519 ; 87.935,48.501 87.935,48.637 ; 87.935,48.704 87.935,48.84 ; 87.935,49.035 87.935,49.196 ; 87.935,49.289 87.935,49.399 ; 87.935,49.695 87.935,49.856 ; 87.935,50.076 87.935,50.364 ; 87.935,50.432 87.935,50.567 ; 87.935,52.159 87.935,52.218 ; 87.935,52.743 87.935,52.98 ; 87.935,53.556 87.935,53.615 ; 87.935,54.75 87.935,54.809 ; 87.935,58.026 87.935,58.136 ; 87.935,60.846 87.935,61.007 ; 87.935,62.116 87.935,62.48 ; 87.935,63.97 87.935,64.105 ; 87.935,65.087 87.935,65.198 ; 87.935,67.043 87.935,67.23 ; 87.935,67.627 87.935,67.788 ; 87.935,68.313 87.935,68.525 ; 87.935,68.694 87.935,69.084 ; 87.96,42.532 87.96,42.668 ; 87.96,43.853 87.96,44.243 ; 87.96,45.58 87.96,45.69 ; 87.96,45.86 87.96,45.995 ; 87.96,46.85 87.96,47.037 ; 87.96,47.409 87.96,47.519 ; 87.96,48.501 87.96,48.637 ; 87.96,48.704 87.96,48.815 ; 87.96,49.035 87.96,49.196 ; 87.96,49.263 87.96,49.373 ; 87.96,49.721 87.96,49.856 ; 87.96,50.102 87.96,50.364 ; 87.96,50.406 87.96,50.567 ; 87.96,51.778 87.96,51.786 ; 87.96,52.159 87.96,52.218 ; 87.96,52.768 87.96,53.107 ; 87.96,53.581 87.96,53.59 ; 87.96,54.699 87.96,54.86 ; 87.96,58.026 87.96,58.136 ; 87.96,60.82 87.96,60.956 ; 87.96,62.141 87.96,62.531 ; 87.96,63.97 87.96,64.105 ; 87.96,65.087 87.96,65.198 ; 87.96,67.018 87.96,67.23 ; 87.96,67.627 87.96,67.788 ; 87.96,68.339 87.96,68.576 ; 87.96,68.77 87.96,69.033 ; 87.986,42.507 87.986,42.642 ; 87.986,43.904 87.986,44.268 ; 87.986,45.58 87.986,45.69 ; 87.986,45.834 87.986,45.995 ; 87.986,46.876 87.986,47.062 ; 87.986,47.409 87.986,47.545 ; 87.986,48.501 87.986,48.637 ; 87.986,48.704 87.986,48.815 ; 87.986,49.035 87.986,49.348 ; 87.986,49.721 87.986,49.831 ; 87.986,50.127 87.986,50.364 ; 87.986,50.406 87.986,50.542 ; 87.986,51.752 87.986,51.761 ; 87.986,52.159 87.986,52.244 ; 87.986,52.819 87.986,53.158 ; 87.986,54.673 87.986,54.885 ; 87.986,58.026 87.986,58.136 ; 87.986,60.795 87.986,60.93 ; 87.986,62.192 87.986,62.556 ; 87.986,63.97 87.986,64.105 ; 87.986,65.087 87.986,65.198 ; 87.986,66.992 87.986,67.255 ; 87.986,67.627 87.986,67.788 ; 87.986,68.364 87.986,68.601 ; 88.011,42.456 88.011,42.617 ; 88.011,43.929 88.011,44.319 ; 88.011,45.58 88.011,45.69 ; 88.011,45.809 88.011,45.97 ; 88.011,46.901 88.011,47.062 ; 88.011,47.409 88.011,47.545 ; 88.011,48.501 88.011,48.637 ; 88.011,48.704 88.011,48.815 ; 88.011,49.035 88.011,49.196 ; 88.011,49.263 88.011,49.297 ; 88.011,49.695 88.011,49.805 ; 88.011,50.178 88.011,50.364 ; 88.011,50.406 88.011,50.542 ; 88.011,51.702 88.011,51.736 ; 88.011,52.184 88.011,52.244 ; 88.011,52.87 88.011,52.929 ; 88.011,53.023 88.011,53.183 ; 88.011,54.648 88.011,54.911 ; 88.011,58.026 88.011,58.136 ; 88.011,60.744 88.011,60.905 ; 88.011,62.217 88.011,62.607 ; 88.011,63.97 88.011,64.105 ; 88.011,65.087 88.011,65.198 ; 88.011,66.942 88.011,67.153 ; 88.011,67.196 88.011,67.255 ; 88.011,67.627 88.011,67.788 ; 88.011,67.932 88.011,68.017 ; 88.011,68.389 88.011,68.652 ; 88.036,42.431 88.036,42.566 ; 88.036,43.955 88.036,44.344 ; 88.036,45.58 88.036,45.69 ; 88.036,45.783 88.036,45.944 ; 88.036,46.901 88.036,47.087 ; 88.036,47.409 88.036,47.545 ; 88.036,48.501 88.036,48.637 ; 88.036,48.679 88.036,48.815 ; 88.036,49.035 88.036,49.17 ; 88.036,49.67 88.036,49.78 ; 88.036,50.203 88.036,50.339 ; 88.036,50.406 88.036,50.542 ; 88.036,51.625 88.036,51.71 ; 88.036,52.184 88.036,52.244 ; 88.036,53.073 88.036,53.234 ; 88.036,54.623 88.036,54.936 ; 88.036,58.026 88.036,58.136 ; 88.036,60.719 88.036,60.854 ; 88.036,62.243 88.036,62.632 ; 88.036,63.944 88.036,64.105 ; 88.036,65.087 88.036,65.198 ; 88.036,66.891 88.036,67.128 ; 88.036,67.196 88.036,67.28 ; 88.036,67.627 88.036,67.788 ; 88.036,67.983 88.036,68.144 ; 88.036,68.44 88.036,68.677 ; 88.036,69.99 88.036,70.049 ; 88.062,42.38 88.062,42.515 ; 88.062,43.98 88.062,44.395 ; 88.062,45.555 88.062,45.69 ; 88.062,45.758 88.062,45.944 ; 88.062,46.926 88.062,47.113 ; 88.062,47.409 88.062,47.545 ; 88.062,48.501 88.062,48.637 ; 88.062,48.679 88.062,48.815 ; 88.062,49.035 88.062,49.17 ; 88.062,49.619 88.062,49.754 ; 88.062,50.228 88.062,50.339 ; 88.062,50.406 88.062,50.516 ; 88.062,51.6 88.062,51.71 ; 88.062,52.184 88.062,52.269 ; 88.062,53.099 88.062,53.26 ; 88.062,54.623 88.062,54.936 ; 88.062,58.026 88.062,58.136 ; 88.062,60.668 88.062,60.803 ; 88.062,62.268 88.062,62.683 ; 88.062,63.944 88.062,64.105 ; 88.062,65.087 88.062,65.198 ; 88.062,66.84 88.062,67.077 ; 88.062,67.196 88.062,67.306 ; 88.062,67.627 88.062,67.763 ; 88.062,68.008 88.062,68.195 ; 88.062,68.466 88.062,68.677 ; 88.062,69.964 88.062,70.074 ; 88.087,42.38 88.087,42.388 ; 88.087,44.056 88.087,44.42 ; 88.087,45.555 88.087,45.69 ; 88.087,45.733 88.087,45.919 ; 88.087,46.926 88.087,47.113 ; 88.087,47.384 88.087,47.545 ; 88.087,48.501 88.087,48.815 ; 88.087,49.035 88.087,49.17 ; 88.087,49.644 88.087,49.729 ; 88.087,50.279 88.087,50.313 ; 88.087,50.381 88.087,50.516 ; 88.087,51.6 88.087,51.685 ; 88.087,52.21 88.087,52.294 ; 88.087,53.124 88.087,53.285 ; 88.087,54.597 88.087,54.961 ; 88.087,58.001 88.087,58.136 ; 88.087,60.668 88.087,60.676 ; 88.087,62.344 88.087,62.708 ; 88.087,63.944 88.087,64.105 ; 88.087,65.087 88.087,65.198 ; 88.087,66.764 88.087,67.052 ; 88.087,67.196 88.087,67.331 ; 88.087,67.627 88.087,67.763 ; 88.087,68.034 88.087,68.22 ; 88.087,68.466 88.087,68.703 ; 88.087,69.939 88.087,70.074 ; 88.113,44.107 88.113,44.471 ; 88.113,45.529 88.113,45.894 ; 88.113,46.952 88.113,47.138 ; 88.113,47.384 88.113,47.545 ; 88.113,48.501 88.113,48.789 ; 88.113,49.035 88.113,49.17 ; 88.113,50.381 88.113,50.516 ; 88.113,51.6 88.113,51.685 ; 88.113,52.21 88.113,52.32 ; 88.113,53.149 88.113,53.31 ; 88.113,54.597 88.113,54.961 ; 88.113,57.975 88.113,58.136 ; 88.113,59.169 88.113,59.432 ; 88.113,62.395 88.113,62.759 ; 88.113,63.919 88.113,64.105 ; 88.113,65.062 88.113,65.198 ; 88.113,66.865 88.113,66.976 ; 88.113,67.196 88.113,67.331 ; 88.113,67.602 88.113,67.763 ; 88.113,68.059 88.113,68.246 ; 88.113,68.491 88.113,68.703 ; 88.113,69.913 88.113,70.1 ; 88.138,44.158 88.138,44.497 ; 88.138,45.529 88.138,45.868 ; 88.138,46.977 88.138,47.164 ; 88.138,47.384 88.138,47.545 ; 88.138,48.501 88.138,48.789 ; 88.138,49.035 88.138,49.17 ; 88.138,50.381 88.138,50.516 ; 88.138,51.6 88.138,51.685 ; 88.138,52.21 88.138,52.345 ; 88.138,53.149 88.138,53.336 ; 88.138,54.623 88.138,54.987 ; 88.138,57.95 88.138,58.136 ; 88.138,58.61 88.138,59.559 ; 88.138,62.446 88.138,62.785 ; 88.138,63.919 88.138,64.105 ; 88.138,65.062 88.138,65.198 ; 88.138,67.221 88.138,67.357 ; 88.138,67.602 88.138,67.763 ; 88.138,68.085 88.138,68.246 ; 88.138,68.516 88.138,68.703 ; 88.138,69.888 88.138,70.125 ; 88.163,44.209 88.163,44.522 ; 88.163,45.504 88.163,45.868 ; 88.163,47.003 88.163,47.189 ; 88.163,47.358 88.163,47.545 ; 88.163,48.501 88.163,48.789 ; 88.163,49.035 88.163,49.17 ; 88.163,50.355 88.163,50.516 ; 88.163,51.625 88.163,51.71 ; 88.163,52.235 88.163,52.371 ; 88.163,53.175 88.163,53.361 ; 88.163,54.648 88.163,54.987 ; 88.163,57.925 88.163,58.136 ; 88.163,58.458 88.163,59.635 ; 88.163,62.497 88.163,62.81 ; 88.163,63.894 88.163,64.105 ; 88.163,65.062 88.163,65.198 ; 88.163,67.221 88.163,67.382 ; 88.163,67.602 88.163,67.763 ; 88.163,68.085 88.163,68.246 ; 88.163,68.542 88.163,68.703 ; 88.163,69.837 88.163,70.151 ; 88.189,44.336 88.189,44.522 ; 88.189,45.479 88.189,45.843 ; 88.189,47.003 88.189,47.189 ; 88.189,47.333 88.189,47.57 ; 88.189,48.501 88.189,48.789 ; 88.189,49.035 88.189,49.17 ; 88.189,50.355 88.189,50.491 ; 88.189,51.625 88.189,51.71 ; 88.189,52.235 88.189,52.371 ; 88.189,53.2 88.189,53.387 ; 88.189,54.673 88.189,54.961 ; 88.189,57.925 88.189,58.136 ; 88.189,58.255 88.189,59.66 ; 88.189,62.624 88.189,62.81 ; 88.189,63.894 88.189,64.08 ; 88.189,65.062 88.189,65.198 ; 88.189,67.221 88.189,67.407 ; 88.189,67.602 88.189,67.763 ; 88.189,68.11 88.189,68.246 ; 88.189,68.593 88.189,68.677 ; 88.189,69.863 88.189,70.125 ; 88.214,45.479 88.214,45.817 ; 88.214,47.028 88.214,47.214 ; 88.214,47.333 88.214,47.57 ; 88.214,48.501 88.214,48.789 ; 88.214,49.035 88.214,49.17 ; 88.214,50.355 88.214,50.491 ; 88.214,51.625 88.214,51.736 ; 88.214,52.261 88.214,52.396